# Altium PCB PCB1.PcbDoc
Units mm, origin at the board's own origin, x right, y up, seen from the top; angles counter-clockwise.
Board outline 152.4 x 101.6 mm, 2 copper layers (Top Layer, Bottom Layer); 18 components, 19 nets, 61 pads, 0 vias.
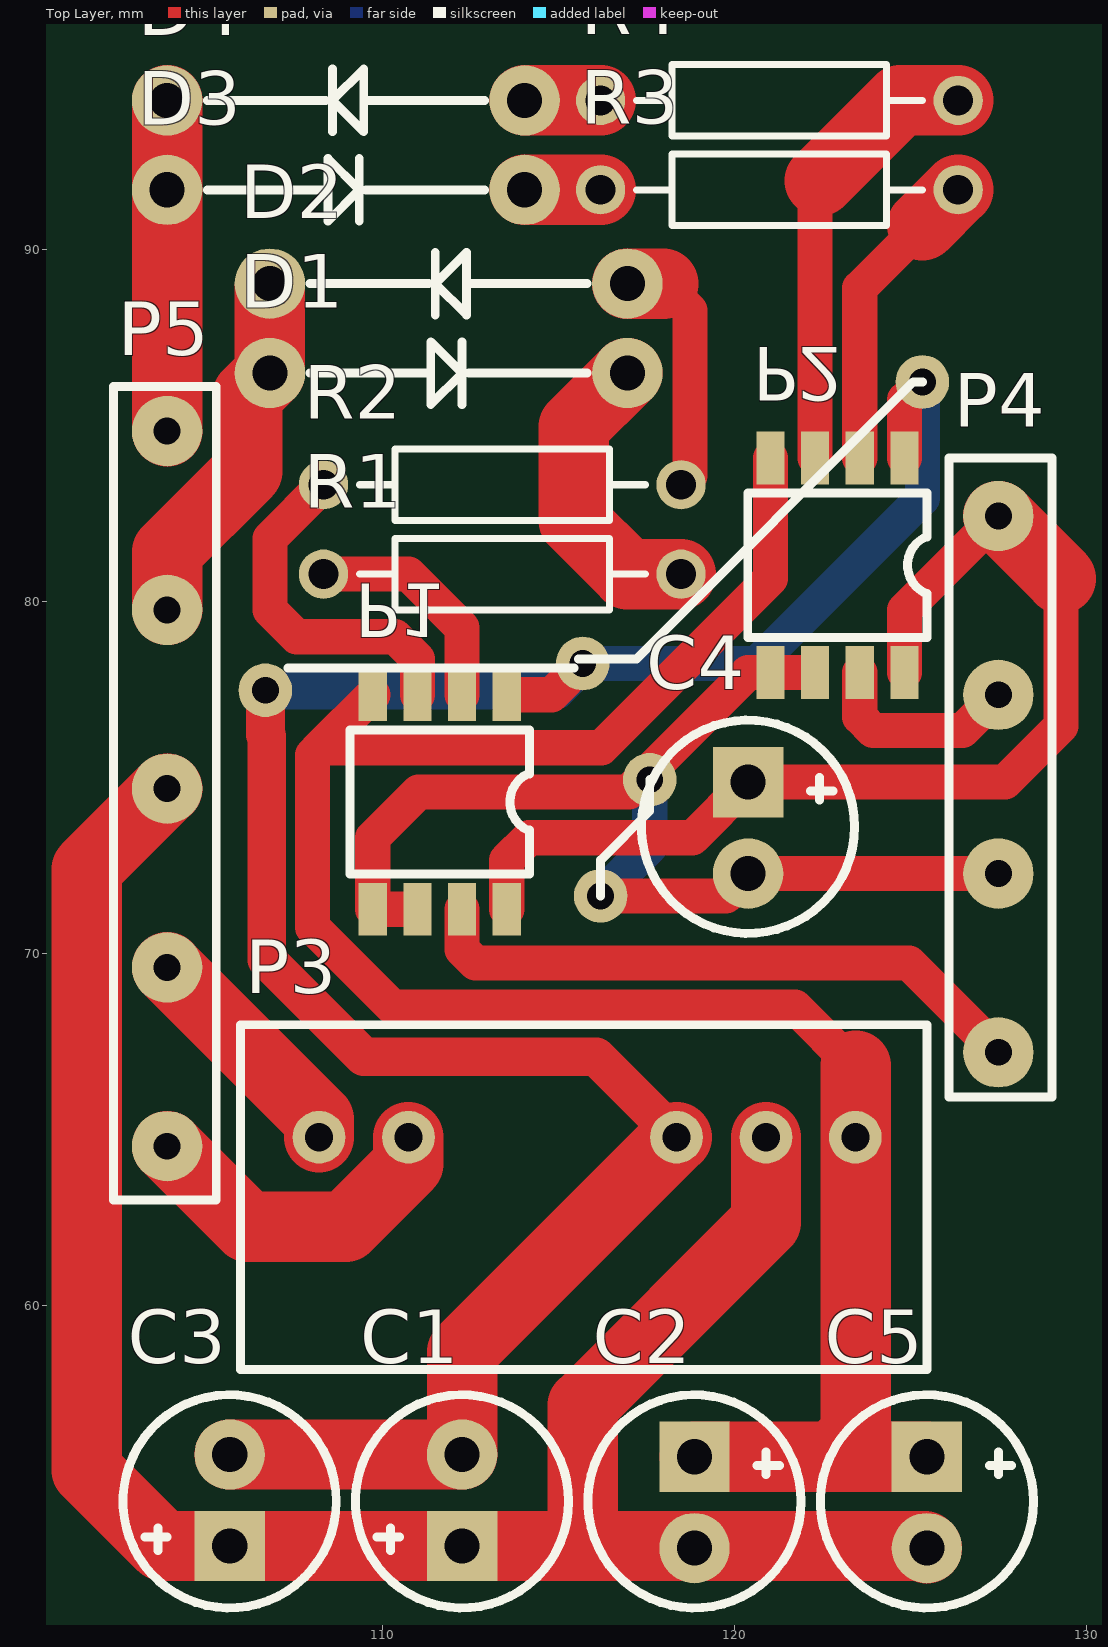
[diagram p0: Top Layer view]
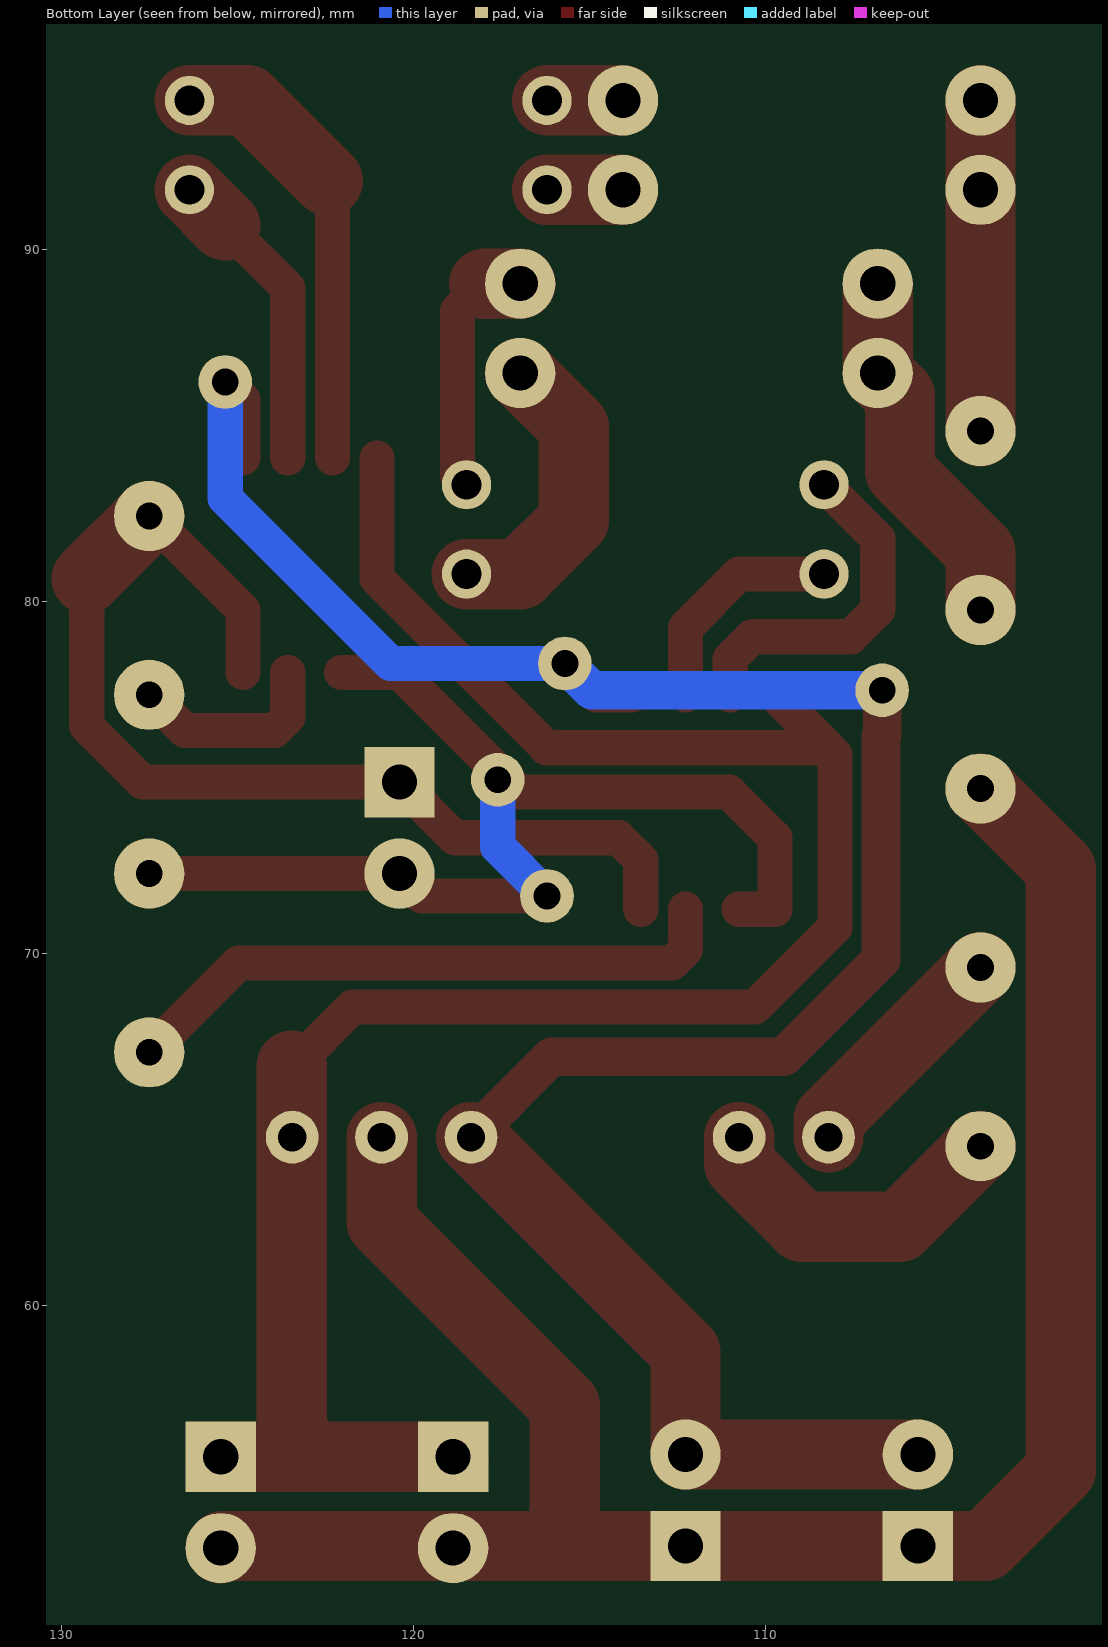
[diagram p1: Bottom Layer view, seen from below]

## Layer stack, top to bottom
Top Solder: solder mask 0.0102, Solder Resist, Dk 3.5
Top Layer: signal copper 0.0356
Dielectric 1: dielectric 0.32, FR-4, Dk 4.8
Bottom Layer: signal copper 0.0356
Bottom Solder: solder mask 0.0102, Solder Resist, Dk 3.5

## Board outline
25.4,25.4 177.8,25.4 177.8,127 25.4,127

## Design rules (kind name [scope] priority, off if disabled: settings)
Clearance [All] p1: gap=0.254 ignorepadtopadclearanceinfootprint=FALSE except(0: Arc-Hole Track-Hole SMDPad-Hole THPad-Hole Via-Hole Fill-Hole Poly-Hole Region-Hole Text-Hole)
PolygonConnect [All] p1: connectstyle=Relief reliefconductorwidth=0.254 reliefentries=4 polygonreliefangle="90 Angle" airgapwidth=0.254
RoutingVias [All] p1: holewidth=0.711 width=1.27 viastyle="Through Hole" minholewidth=0.711 minwidth=1.27 maxholewidth=0.711 maxwidth=1.27
SolderMaskExpansion [All] p1: expansion=0.102
Width [All] p1: maxlimit=4 minlimit=0.254 preferedwidth=0.254
30 further rules are at their usual default settings.

## Classes and differential pairs
component class Sheet1: C1 C2 C3 C4 C5 D1 D2 D3 D4 P1 P2 P3 P5 R1 R2 R3 R4

## Components (designator, comment, footprint, x,y, rotation, side; value= is the part's Value field where it differs from the comment)
C1 "Cap Pol1" C-10uF 112.268,53.153 r90 top value=1uF
C2 "Cap Pol1" C-10uF 118.872,55.693 r270 top value=1uF
C3 "Cap Pol1" C-10uF 105.664,53.153 r90 top value=1uF
C4 "Cap Pol1" C-10uF 120.396,74.863 r270 top value=1uF
C5 "Cap Pol1" C-10uF 125.476,55.693 r270 top value=1uF
D1 "D Schottky" Diode 106.807,86.487 r0 top
D2 "D Schottky" Diode 116.967,89.027 r180 top
D3 "D Schottky" Diode 103.886,91.694 r0 top
D4 "D Schottky" Diode 114.046,94.234 r180 top
P1 "1EDI60N12AF" sop-8 111.633,74.295 r180 top
P2 "1EDI60N12AF" sop-8 122.936,81.026 r180 top
P3 "DC/DC_Mokuai" DC/DC_MoKuai 108.204,64.77 r270 top
P4 "Header 4" 4_DuanZi 127.508,72.136 r90 top locked
P5 "Header 5" 5_DuanZi 103.759,79.502 r270 top locked
R1 "Res2" AXIAL-0.4 113.411,80.772 r0 top value=3.3
R2 "Res2" AXIAL-0.4 113.411,83.312 r0 top value=10
R3 "Res2" AXIAL-0.4 121.285,91.694 r180 top value=3.3
R4 "Res2" AXIAL-0.4 121.285,94.234 r180 top value=10

## Footprints (in the part's own frame and the unit in brackets; to place one, negate y for a bottom-side part, rotate by r counter-clockwise, add the part's x,y. Pads: shape width x height; smd on the part's side, far side on the other; paste and mask are expansions set on the pad)
4_DuanZi [mm]
  round 2 hole 0.762: 1(-4.953,0) 2(0.127,0) 3(5.207,0) 4(10.287,0)
  silkscreen extent -6.22,-1.52 11.94,1.4
5_DuanZi [mil]
  round 78.74 hole 30: 1(-210,5) 2(-10,5) 3(190,5) 4(390,5) 5(590,5)
  silkscreen extent -260,-55 650,60
AXIAL-0.4 [mm] "Axial Device, Thru-Hole; 2 Leads; 0.4 in Pin Spacing"
  round 1.4 hole 0.85: 1(-5.08,0) 2(5.08,0)
  silkscreen extent -4.06,-1.02 4.06,1.02
C-10uF [mm]
  rect 2x2 hole 1: 1(0,0)
  round 2 hole 1: 2(2.6,0)
  silkscreen extent -1.76,-3.03 4.3,3.03
DC/DC_MoKuai [mm]
  round 1.5 hole 0.8: 1(0,0) 2(0,2.54) 3(0,10.16) 4(0,12.7) 5(0,15.24)
  silkscreen extent -3.2,-2.23 6.6,17.27
Diode [mm]
  round 2 hole 1: 1(0,0) 2(10.16,0)
  silkscreen extent 1.14,-0.89 9.02,0.89
sop-8 [mm]
  rect 0.8x1.5 smd: 1(-1.905,3.048) 2(-0.635,3.048) 3(0.635,3.048) 4(1.905,3.048) 5(1.905,-3.048) 6(0.635,-3.048) 7(-0.635,-3.048) 8(-1.905,-3.048)
  silkscreen extent -2.55,-2.05 2.55,2.05

## Part data
C1 C2 C3 C4 C5: "Polarized Capacitor (Radial)", LatestRevisionDate=17-Jul-2002, LatestRevisionNote="Re-released for DXP Platform.", PackageDescription="Polarized Capacitor (Radial); 2 Leads", PackageReference=RB7.6-15, Published=8-Jun-2000, Publisher="Altium Limited"
D1 D2 D3 D4: "Schottky Diode", Code_JEDEC=DO-214-AA, LatestRevisionDate=17-Jul-2002, LatestRevisionNote="Re-released for DXP Platform.", PackageDescription="DO-214-AA/SMB; 2 C-Bend Leads; Body 5.3 x 3.6 mm, inc. leads (LxW)", PackageReference=SMB, Published=8-Jun-2000, Publisher="Altium Limited"
P4: "Header, 4-Pin", LatestRevisionDate=17-Jul-2002, LatestRevisionNote="Re-released for DXP Platform.", Publisher="Altium Limited"
P5: "Header, 5-Pin", LatestRevisionDate=17-Jul-2002, LatestRevisionNote="Re-released for DXP Platform.", Publisher="Altium Limited"
R1 R2 R3 R4: "Resistor", LatestRevisionDate=17-Jul-2002, LatestRevisionNote="Re-released for DXP Platform.", PackageDescription="Axial Device, Thru-Hole; 2 Leads; 0.4 in Pin Spacing", PackageReference=AXIAL-0.4, Published=8-Jun-2000, Publisher="Altium Limited"

## Free pads (board coordinates)
  round 1.524 hole 0.762: 2(125.349,86.233) 3(115.697,78.232) 4(117.602,74.93) 5(116.205,71.628) 6(106.68,77.47)

## Nets (pads, with @x,y where several pads share a name; then routed paths per layer and width w, separated by ;. In a path a pad name is that pad's centre, name@x,y a point inside that pad or via, vN(x,y) a via of type N, cw(c..) or ccw(c..) an arc to the next point about the centre after c; other vN are vias at no path point)
3.3V-DSP: C4.1 P1.1 P2.1 P4.4 | length 31
  Top Layer w1: P1.1 113.538,72.644 114.173,73.279 118.812,73.279 C4.1 127.695,74.863 129.286,76.454 129.286,80.645 ; P2.1 124.841,79.756 P4.4
  Top Layer w2: P4.4 129.286,80.645
15V: P3.1 P5.4 | length 6.6
  Top Layer w2: P5.4 108.204,65.278 P3.1
20V: C2.1 C5.1 P1.5 P2.5 P3.5 | length 60.6
  Top Layer w1: P1.5 108.224,75.839 ; P2.5 121.031,80.645 116.225,75.839 108.224,75.839 ; 123.454,66.802 123.395,66.802 121.728,68.469 110.29,68.469 108.02,70.739 108.02,75.635 108.224,75.839
  Top Layer w2: C2.1 122.809,55.693 ; 123.454,66.802 123.454,56.338 122.809,55.693 ; C5.1 122.809,55.693
-4V: C1.2 C3.2 P1.8 P2.8 P3.3 pad.2 pad.3 pad.6 | length 68.4
  Top Layer w1: 106.68,76.21 106.716,76.175 ; P1.8@113.792,77.343 114.808,77.343 pad.3 ; P2.8 124.841,85.725 pad.2
  Top Layer w1.1: 106.68,76.21 pad.6 ; 106.716,76.175 106.716,69.814 109.474,67.056 116.078,67.056 P3.3
  Top Layer w2: C3.2 C1.2 112.268,58.674 P3.3
  Bottom Layer w1: pad.3 120.65,78.232 125.349,82.931 pad.2
  Bottom Layer w1.1: pad.6 114.935,77.47 pad.3
DSP-PWM1: P1.2 P4.1 | length 17.6
  Top Layer w1: P1.2 112.268,70.104 112.649,69.723 124.968,69.723 P4.1
DSP-PWM2: P2.2 P4.3 | length 5.8
  Top Layer w1: P2.2 123.571,76.708 123.952,76.327 126.492,76.327 P4.3
GND: C4.2 P1.3 P1.4 P2.3 P2.4 P4.2 pad.4 pad.5 | length 32.8
  Top Layer w1: P1.3@110.744,71.247 P1.4 109.728,73.279 111.034,74.585 117.003,74.585 120.396,77.978 P2.4 P2.3@122.047,77.978 ; pad.5 119.761,71.628 C4.2 P4.2
  Bottom Layer w1: pad.5 117.602,73.025 pad.4
GND2: P3.2 P5.5 | length 9.3
  Top Layer w2: P5.5 106.172,62.23 108.966,62.23 110.744,64.008 P3.2
GS: C1.1 C2.2 C3.1 C5.2 P3.4 P5.3 | length 58.9
  Top Layer w2: P5.3 101.6,72.39 101.6,55.312 103.759,53.153 C3.1 C1.1 115.697,53.153 ; P3.4 120.904,62.357 115.697,57.15 115.697,53.153 ; C5.2 125.416,53.153 115.697,53.153
NetD1_1: D1.2 R1.2 | length 8.5
  Top Layer w2: D1.2 115.443,84.963 115.443,82.296 116.967,80.772 R1.2
NetD2_2: D2.1 R2.2 | length 7.2
  Top Layer w1: 117.983,89.027 118.745,88.265 118.745,83.566 R2.2
  Top Layer w2: D2.1 117.983,89.027
NetD3_1: D3.2 R3.2 | length 2.2
  Top Layer w2: D3.2 R3.2
NetD4_2: D4.1 R4.2 | length 2.2
  Top Layer w2: D4.1 R4.2
NetP1_6: P1.6 R2.1 | length 10
  Top Layer w1: R2.1 106.807,81.788 106.807,79.756 107.569,78.994 110.363,78.994 110.998,78.359 P1.6
NetP1_7: P1.7 R1.1 | length 6.5
  Top Layer w1: R1.1 110.744,80.772 112.268,79.248 P1.7
NetP2_6: P2.6 R4.1 | length 12.8
  Top Layer w1: P2.6 122.301,91.821 122.428,91.948
  Top Layer w2: 122.428,91.948 124.714,94.234 R4.1
NetP2_7: P2.7 R3.1 | length 8.8
  Top Layer w1: P2.7 123.571,88.9 125.349,90.678
  Top Layer w2: 125.349,90.678 R3.1
PWM1: D1.1 D2.2 P5.2 | length 10.4
  Top Layer w2: P5.2 103.886,81.407 106.172,83.693 106.172,85.852 D1.1 D2.2@106.807,88.9
PWM2: D3.1 D4.2 P5.1 | length 9.4
  Top Layer w2: P5.1 D3.1 D4.2

## Silkscreen, mask and mechanical layers (free items; w line width, h text height)
Top Overlay:
  lines w0.254: 107.315,78.105 115.443,78.105 ; 115.57,78.359 117.221,78.359 125.095,86.233 125.349,86.233 ; 116.205,71.628 116.205,72.644 117.602,74.041 117.602,74.93
  text "不能镜像打印" at 134.493,66.802 h3 r90